# EAGLE board Pi-Puck Expansion v1.0 (EAGLE 9.5.2)
CREVISION: v1.0
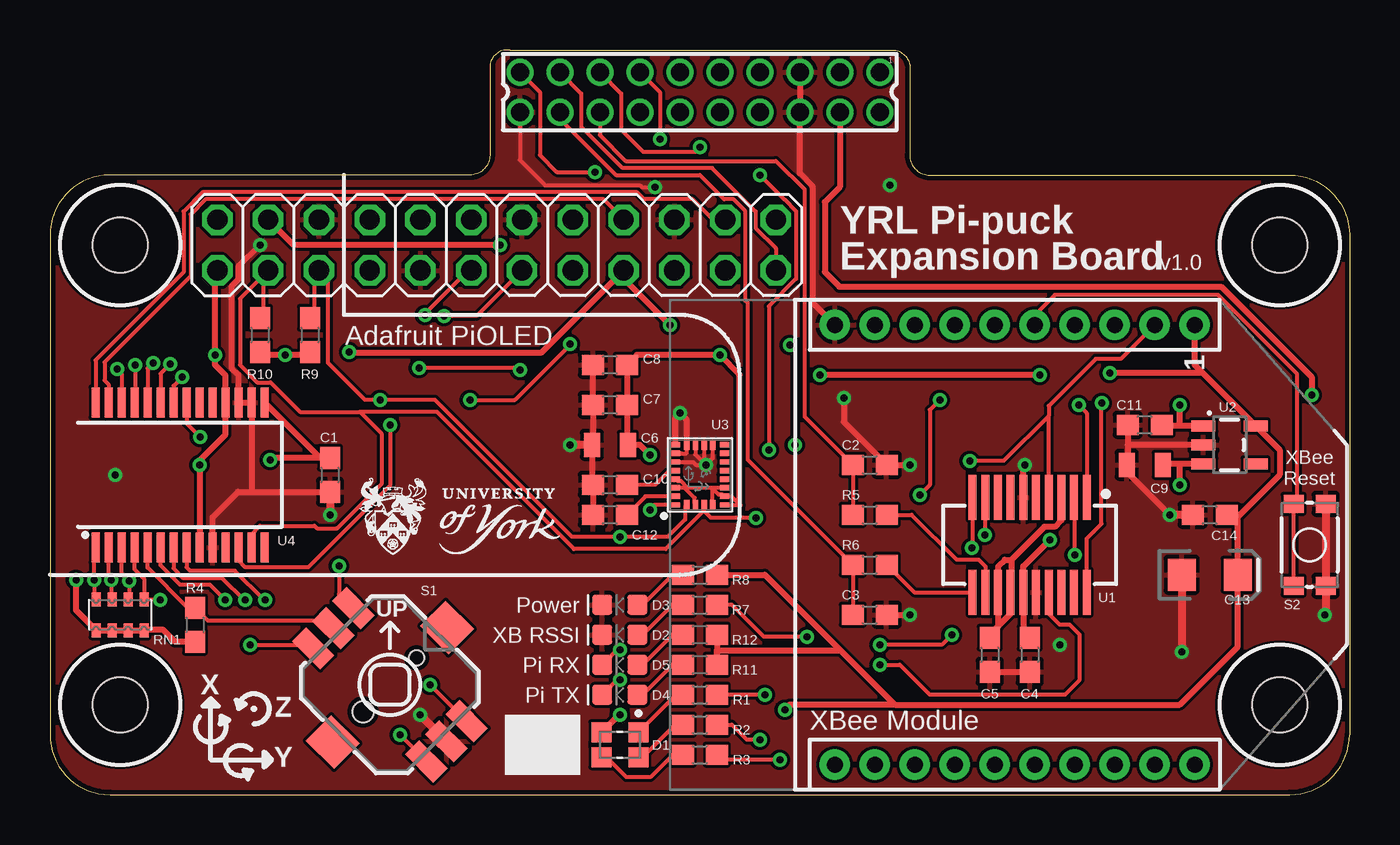
[diagram p0: board, top side]
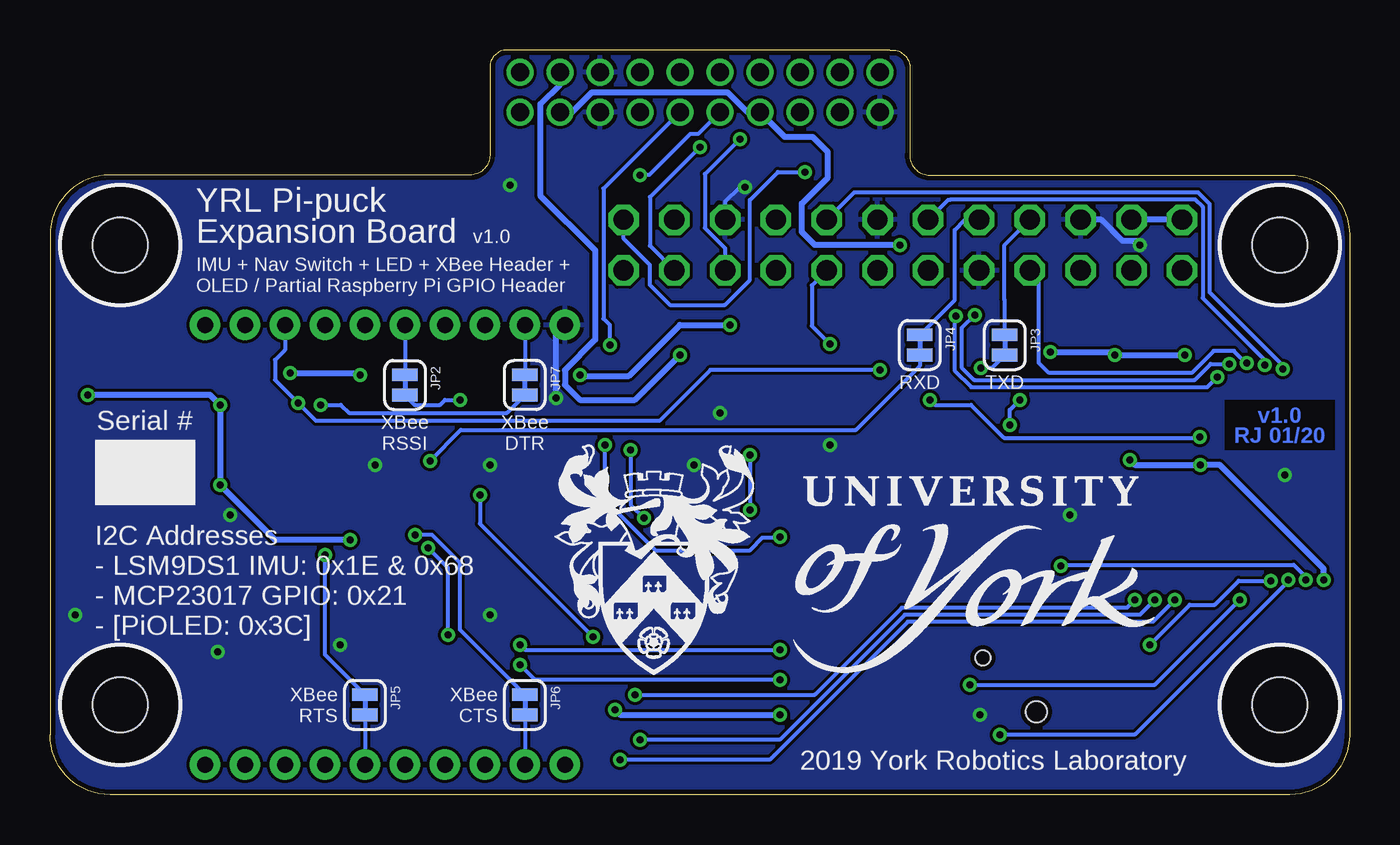
[diagram p1: board, bottom side, seen from below]

Size 65 x 37.26 mm. Coordinates in mm from the lower left corner, seen from the top.
Outline: 21,31 3,31 arc90 0,28 0,3 arc90 3,0 62,0 arc90 65,3 65,28 arc90 62,31 44,31 arc-90 43,32 43,36.5 arc90 42,37.25 23,37.25 arc90 22,36.5 22,32 arc-90 21,31
Copper layers (1*16): Top 0.018mm / dielectric 1.55mm / Bottom 0.018mm
Design rules "eC_2Layer_PClass6_BaseCopperO18_eCDefault *": minimum track width 0.15mm, minimum drill 0.35mm, track to track 0.15mm, track to pad 0.15mm, pad to pad 0.15mm, via to via 0.15mm, smd to smd 0mil, copper to edge 0.25mm, drill to drill 0.35mm, minimum pad ring 0.175mm, minimum via ring 0.125mm, stop-mask expansion 0mil, vias tented up to drill 0.45mm, thermal gap 0.2mm
Net classes: 0 default: width 0.203 mm
Holes 2.75 mm at 3.5,27.5 61.5,27.5 61.5,4.5 3.5,4.5
tRestrict: area 58.5,24.5 to 64.5,30.5; area 0.5,24.5 to 6.5,30.5; area 0.5,1.5 to 6.5,7.5; area 58.5,1.5 to 64.5,7.5
bRestrict: area 58.5,24.5 to 64.5,30.5; area 0.5,24.5 to 6.5,30.5; area 0.5,1.5 to 6.5,7.5; area 58.5,1.5 to 64.5,7.5; area 0.8,17.2 to 6.2,19.8

## Footprints (pad centres in the part's own frame; a part is rotated, then mirrored left to right if it is on the bottom)
0603 = smd 1.1 x 1: 1 -0.85,0; 2 0.85,0
0805 = smd 0.8 x 1.2: 1 -0.9,0; 2 0.9,0
EIA3216 = smd 1.4 x 1.6: + 1.4,0; - -1.4,0
LED_150080M153000 = smd 1 x 1: 1 -0.625,0.925; 2 0.625,0.925; 3 0.625,-0.925; 4 -0.625,-0.925
LED-0603 = smd 1 x 1: A -0.877,0; C 0.877,0
2X12 = drill 1.016 octagon: 1 -13.97,-1.27; 2 -13.97,1.27; 3 -11.43,-1.27; 4 -11.43,1.27; 5 -8.89,-1.27; 6 -8.89,1.27; 7 -6.35,-1.27; 8 -6.35,1.27; 9 -3.81,-1.27; 10 -3.81,1.27; 11 -1.27,-1.27; 12 -1.27,1.27; 13 1.27,-1.27; 14 1.27,1.27; 15 3.81,-1.27; 16 3.81,1.27; 17 6.35,-1.27; 18 6.35,1.27; 19 8.89,-1.27; 20 8.89,1.27; 21 11.43,-1.27; 22 11.43,1.27; 23 13.97,-1.27; 24 13.97,1.27
SMT-JUMPER_2_NC_TRACE_SILK = smd 0.635 x 1.27: 1 -0.508,0; 2 0.508,0
XBEE-SILK = drill 0.8 pad 1.524: 1 -11,20; 2 -11,18; 3 -11,16; 4 -11,14; 5 -11,12; 6 -11,10; 7 -11,8; 8 -11,6; 9 -11,4; 10 -11,2; 11 11,2; 12 11,4; 13 11,6; 14 11,8; 15 11,10; 16 11,12; 17 11,14; 18 11,16; 19 11,18; 20 11,20
EXBV8V = smd 0.45 x 0.7: 1 -1.2,-0.775; 2 -0.4,-0.775; 3 0.4,-0.775; 4 1.2,-0.775; 5 1.2,0.775; 6 0.4,0.775; 7 -0.4,0.775; 8 -1.2,0.775
JOYSTICK_MINI = smd 2 x 1: A -4,1.425; B 4,1.425; C -4,-1.425; CTR -4,0; D 4,-1.425; GND 4,0 | smd 2 x 1.8: NC 0,4.05; NC@0 0,-4.05 | hole 0.75: 0,1.9 | hole 1.05: 0,-1.9
TACTILE_SWITCH_SMD_4.6X2.8MM = smd 0.9 x 1: 1 -2.05,-0.8; 2 2.05,-0.8; 3 2.05,0.8; 4 -2.05,0.8
SSOP20_L = smd 0.4 x 2.25: 1 -2.857,-2.375; 2 -2.223,-2.375; 3 -1.587,-2.375; 4 -0.953,-2.375; 5 -0.318,-2.375; 6 0.318,-2.375; 7 0.953,-2.375; 8 1.587,-2.375; 9 2.223,-2.375; 10 2.857,-2.375; 11 2.857,2.375; 12 2.223,2.375; 13 1.587,2.375; 14 0.953,2.375; 15 0.318,2.375; 16 -0.318,2.375; 17 -0.953,2.375; 18 -1.587,2.375; 19 -2.223,2.375; 20 -2.857,2.375
SOT23-5 = smd 0.55 x 1.2: 1 -0.95,-1.3; 2 0,-1.3; 3 0.95,-1.3; 4 0.95,1.3; 5 -0.95,1.3
LGA24-8X4 = smd 0.27 x 0.45: 1 -1.505,1.225; 6 -1.505,-1.225; 7 -1.075,-1.225; 8 -0.645,-1.225; 9 -0.215,-1.225; 10 0.215,-1.225; 11 0.645,-1.225; 12 1.075,-1.225; 13 1.505,-1.225; 18 1.505,1.225; 19 1.075,1.225; 20 0.645,1.225; 21 0.215,1.225; 22 -0.215,1.225; 23 -0.645,1.225; 24 -1.075,1.225 | smd 0.45 x 0.27: 2 -1.475,0.645; 3 -1.475,0.215; 4 -1.475,-0.215; 5 -1.475,-0.645; 14 1.475,-0.645; 15 1.475,-0.215; 16 1.475,0.215; 17 1.475,0.645
SSOP28 = smd 0.4 x 1.5: 1 -4.225,-3.625; 2 -3.575,-3.625; 3 -2.925,-3.625; 4 -2.275,-3.625; 5 -1.625,-3.625; 6 -0.975,-3.625; 7 -0.325,-3.625; 8 0.325,-3.625; 9 0.975,-3.625; 10 1.625,-3.625; 11 2.275,-3.625; 12 2.925,-3.625; 13 3.575,-3.625; 14 4.225,-3.625; 15 4.225,3.625; 16 3.575,3.625; 17 2.925,3.625; 18 2.275,3.625; 19 1.625,3.625; 20 0.975,3.625; 21 0.325,3.625; 22 -0.325,3.625; 23 -0.975,3.625; 24 -1.625,3.625; 25 -2.275,3.625; 26 -2.925,3.625; 27 -3.575,3.625; 28 -4.225,3.625
87758-2016 = drill 0.9 pad 1.27: 1 -9,-1; 2 -9,1; 3 -7,-1; 4 -7,1; 5 -5,-1; 6 -5,1; 7 -3,-1; 8 -3,1; 9 -1,-1; 10 -1,1; 11 1,-1; 12 1,1; 13 3,-1; 14 3,1; 15 5,-1; 16 5,1; 17 7,-1; 18 7,1; 19 9,-1; 20 9,1

## Placement (x,y rotation side)
C1  0.1uF  [0603]  14,16 270 top
C2  47pF  [0603]  41,16.5 0 top
C3  47pF  [0603]  41,9 0 top
C4  0.1uF  [0603]  49,7 270 top
C5  0.1uF  [0603]  47,7 270 top
C6  10uF  [0805]  28,17.5 180 top
C7  0.1uF  [0603]  28,19.5 180 top
C8  0.1uF  [0603]  28,21.5 180 top
C9  10uF  [0805]  54.75,16.5 180 top
C10  10nF  [0603]  28,15.5 180 top
C11  0.1uF  [0603]  54.75,18.5 180 top
C12  0.1uF  [0603]  28,14 180 top
C13  10uF  [EIA3216]  58,11 0 top
C14  0.1uF  [0603]  58,14 180 top
D1  150080M153000  [LED_150080M153000]  28.5,2.5 270 top
D2  BLUE  [LED-0603]  28.5,8 180 top
D3  RED  [LED-0603]  28.5,9.5 180 top
D4  GREEN  [LED-0603]  28.5,5 180 top
D5  RED  [LED-0603]  28.5,6.5 180 top
JP1  Pi Header  [2X12]  22.34,27.5 0 top
JP2  RSSI_LED_EN  [SMT-JUMPER_2_NC_TRACE_SILK]  47.25,20.5 270 bottom
JP3  TXD  [SMT-JUMPER_2_NC_TRACE_SILK]  17.25,22.5 270 bottom
JP4  RXD  [SMT-JUMPER_2_NC_TRACE_SILK]  21.5,22.5 270 bottom
JP5  CTS_EN  [SMT-JUMPER_2_NC_TRACE_SILK]  49.25,4.5 270 bottom
JP6  RTS_EN  [SMT-JUMPER_2_NC_TRACE_SILK]  41.25,4.5 270 bottom
JP7  DTR  [SMT-JUMPER_2_NC_TRACE_SILK]  41.25,20.5 90 bottom
JP8  XBEE  [XBEE-SILK]  37.25,12.5 270 top
LOGO1  UOY-LOGO-30MM  [UOY-LOGO-30MM-WIDE]  39.75,6 0 bottom
LOGO2  UOY-LOGO-10MM  [UOY-LOGO-10MM-WIDE]  15.5,12 0 top
R1  1k  [0603]  32.5,5 0 top
R2  1k  [0603]  32.5,3.5 0 top
R3  1k  [0603]  32.5,2 0 top
R4  10k  [0603]  7.25,8.5 270 top
R5  27  [0603]  41,14 0 top
R6  27  [0603]  41,11.5 0 top
R7  1k  [0603]  32.5,9.5 0 top
R8  2.0k  [0603]  32.5,11 0 top
R9  4.7k  [0603]  13,23 270 top
R10  4.7k  [0603]  10.5,23 270 top
R11  1k  [0603]  32.5,6.5 180 top
R12  1k  [0603]  32.5,8 180 top
RN1  10k  [EXBV8V]  3.5,9 180 top
S1  Navigation  [JOYSTICK_MINI]  17,5.5 315 top
S2  Reset  [TACTILE_SWITCH_SMD_4.6X2.8MM]  63,12.5 90 top
U1  FT231XS  [SSOP20_L]  49,12.5 180 top
U2  MIC5219 3.3V  [SOT23-5]  59,17.5 270 top
U3  LSM9DS1  [LGA24-8X4]  32.5,16 90 top
U4  MCP23017SS  [SSOP28]  6.5,16 0 top
X1  87758-2016  [87758-2016]  32.5,35.15 180 top

## Library data of the parts
C1 C4 C5 C7 C8 C11 C12 C14 = SparkFun-Capacitors; PROD_ID: CAP-00810
C2 C3 = SparkFun-Capacitors; PROD_ID: CAP-08913
C6 C9 = SparkFun-Capacitors; PROD_ID: CAP-11330
C10 = SparkFun-Capacitors; PROD_ID: CAP-00867
C13 = SparkFun-Capacitors; PROD_ID: CAP-00811
D1 = 150080M153000; AVAILABILITY: Unavailable; DESCRIPTION: SMD Full Color LED Chip RGB 3.9 V 0805 | Würth Elektronik 150080M153000 @ LED, SMD _SMD Full Color LED Chip RGB 3.9 V...; MF: Wurth Electronics; MP: 150080M153000; PACKAGE: SMD-4 Würth Elektronik; PRICE: None
D2 = SparkFun-LED; PROD_ID: DIO-08575
D3 D5 = SparkFun-LED; PROD_ID: DIO-00819
D4 = SparkFun-LED; PROD_ID: DIO-00821
JP1 = pinhead
JP2-JP7 = SparkFun-Jumpers
JP8 = SparkFun-RF
LOGO1 LOGO2 = yrl-logos
R1-R3 R7 R11 R12 = SparkFun-Resistors; PROD_ID: RES-07856
R4 = SparkFun-Resistors; PROD_ID: RES-00824
R5 R6 = SparkFun-Resistors; PROD_ID: RES-09334
R8 = SparkFun-Resistors; PROD_ID: RES-08296
R9 R10 = SparkFun-Resistors; PROD_ID: RES-07857
RN1 = resistor-dil; OC_FARNELL: unknown; OC_NEWARK: unknown
S1 = SparkFun-Switches; PROD_ID: SWCH-09905; SF_SKU: COM-10063
S2 = SparkFun-Switches; PROD_ID: SWCH-13065
U1 = SparkFun-IC-Comms; PROD_ID: IC-11524
U2 = SparkFun-IC-Power; PROD_ID: VREG-09872
U3 = LSM9DS1; PROD_ID: IC-12536
U4 = microchip; MF: MICROCHIP; MPN: MCP23017-E/SS; OC_FARNELL: 1467674; OC_NEWARK: 31K2960
X1 = con-molex; MF: MOLEX; MPN: 87758-2016; OC_FARNELL: 7472374; OC_NEWARK: 25M5677

## Nets
3.3V: C1.1 C13.+ C14.1 D1.4 JP1.1 JP1.17 JP8.1 R4.2 R8.2 R9.2 R10.2 R11.1 R12.1 RN1.5 RN1.6 RN1.7 RN1.8 U2.5 U4.9 U4.15 U4.18
3V-INT: C5.1 U1.3 U1.13 U1.14
+3V: C6.1 C7.1 C8.1 U3.1 U3.3 U3.5 U3.6 U3.7 U3.8 U3.22 U3.23 X1.3
+5V: C4.1 C9.1 C11.1 JP1.2 JP1.4 U1.15 U2.1 U2.3 X1.4 X1.14
AIN_EXT2: X1.9
AIN_EXT3: X1.11
BATT_AUX+: X1.2
BATT_EPUCK+: X1.1
C1: C12.1 U3.24
CAP: C10.1 U3.21
CHARGE_DETECT: X1.7
CTS: JP6.1 U1.9
CTS_XBEE: JP6.2 JP8.12
DTR: JP7.1 U1.1
DTR_XBEE: JP7.2 JP8.9
GND: C1.2 C2.2 C3.2 C4.2 C5.2 C6.2 C7.2 C8.2 C9.2 C10.2 C11.2 C12.2 C13.- C14.2 D2.C D3.C JP1.6 JP1.9 JP1.14 JP1.20 JP8.10 S1.GND S2.1 S2.2 U1.6 U1.16 U2.2 U3.14 U3.15 U3.16 U3.17 U3.18 U3.19 U3.20 U4.10 U4.16 U4.17 X1.5 X1.6 X1.20
GPA0: JP1.15 U4.21
GPA1: JP1.13 U4.22
GPA2: JP1.11 U4.23
GPA3: JP1.7 U4.24
GPA4: JP1.12 U4.25
GPA5: JP1.16 U4.26
GPA6: JP1.18 U4.27
GPA7: JP1.22 U4.28
LED_USER_B: R3.2 U4.6
LED_USER_G: R2.2 U4.7
LED_USER_R: R1.2 U4.8
N$1: D5.A R12.2
N$2: JP1.8 JP3.1
N$3: JP1.10 JP4.1
N$4: D4.A R11.2
N$6: D1.1 R1.1
N$7: R6.2 U1.11
N$8: R5.2 U1.12
N$9: JP2.2 R7.2
N$10: D1.2 R2.1
N$11: D1.3 R3.1
N$38: D3.A R8.1
NAV_CENT: R4.1 S1.CTR U4.5
NAV_DOWN: RN1.3 S1.D U4.2
NAV_LEFT: RN1.2 S1.C U4.3
NAV_RIGHT: RN1.1 S1.B U4.4
NAV_UP: RN1.4 S1.A U4.1
PIC_RESET/RESET_F407: X1.8
RESET_XBEE: JP8.5 S2.3 S2.4
RPI_SPI0_CE0: JP1.24 X1.19
RPI_SPI0_MISO: JP1.21 X1.15
RPI_SPI0_MOSI: JP1.19 X1.13
RPI_SPI0_SCLK: JP1.23 X1.17
RSSI_XBEE: JP2.1 JP8.6
RSSILED: D2.A R7.1
RTS: JP5.1 U1.2
RTS_XBEE: JP5.2 JP8.16
RXD: JP4.2 JP8.2 U1.4
RXLED: D5.C U1.10
SCL_BOARD: JP1.5 R9.1 U3.2 U4.12 X1.10
SDA_BOARD: JP1.3 R10.1 U3.4 U4.13 X1.12
TXD: JP3.2 JP8.3 U1.20
TXLED: D4.C U1.17
USB_AUX2_DM: C2.1 R5.1 X1.16
USB_AUX2_DP: C3.1 R6.1 X1.18

## Tracks (layer width: path | path; a pad name or v marks a point on that pad's centre or on a via)
3.3V  (via drill 0.35 pad 0.7)
  Top 0.305: U2.5 | U2.5 57.25,21.5 JP8.1 | U2.5 61.5,17.25 61.5,16 59.5,14 | 42.25,4.5 56.5,4.5 59.4,7.4 C13.+ 59.4,13.9 59.5,14 | R8.2 35.75,11 39.52,7.22 | 42.25,4.5 39.52,7.22 | R4.2 6.25,7.65 5.65,8.25 4.72,8.25 RN1.8 RN1.7 RN1.6 RN1.5 1.3,9.22 v1.3,10.75 | U4.15 13.5,16.85 C1.1 11.1,16.85 v11,16.75 | JP1.1 8.25,26.11 v8.25,22 8.25,21.5 8.78,20.98 U4.18 8.78,18.02 7.47,16.73 v7.47,16.5 U4.9 | R9.2 12.85,22 v11.75,22 10.65,22 R10.2 | v14.95,22.15 15,22.1 24.56,22.1 JP1.17 28.69,25.81 v31,23.5 | U2.5 57.65,21.1 v53,21.1 | v49.5,21 v38.5,21 | 59.5,14 C14.1 | D1.4 28.45,4 v28.5,4 | v36.75,4.25 37,4.5 42.25,4.5 | R12.1 R11.1 33.35,7.22 39.52,7.22
  Bottom 0.305: v11,16.75 10.75,16.5 v7.47,16.5 6.5,16.5 1.3,11.3 v1.3,10.75 | v8.25,22 v11.75,22 11.9,22.15 v14.95,22.15 | v53,21.1 49.6,21.1 v49.5,21 | v38.5,21 38.45,20.95 36.05,20.95 33.5,23.5 v31,23.5 | v36.75,4.25 36.5,4 v28.5,4
3V-INT
  Top 0.305: C5.1 47,8 47.41,8.41 | 48.08,11.75 47.75,11.75 47.41,11.41 U1.13 47.41,8.41 | 48.08,11.75 49.73,13.4 50.25,13.4 50.59,13.74 U1.3 | 48.08,11.75 48.08,10.15 U1.14 48.05,9.05 47.41,8.41
+3V  (via drill 0.35 pad 0.7)
  Top 0.203: U3.3 32.24,14.57 32.24,14.85 31.74,15.36 U3.23 31.89,15.36 | U3.8 33.1,15.36 | 33.1,15.36 31.89,15.36 | 33.15,15.31 33.45,15.01 33.64,15.01 U3.7 34.08,14.93 34.5,14.5 34.49,14.49 U3.6 | U3.5 33.15,15.31 | 33.15,15.31 33.1,15.36 | U3.22 31.36,15.7 31.55,15.7 31.89,15.36 | U3.1 30.25,14.5 v30,14.25
  Top 0.305: 34.49,14.49 34.49,21 v33.5,22 29.35,22 C8.1 C7.1 28.85,17.55 C6.1 29.5,17.5 v30,17
  Bottom 0.203: v30,17 v30,14.25
  Bottom 0.305: X1.3 39.5,35.53 40.48,34.55 40.48,29.98 37.74,27.24 37.74,22.76 39.25,21.25 39.25,20.5 38.5,19.75 35.75,19.75 v33.5,22
+5V  (via drill 0.35 pad 0.7)
  Top 0.305: X1.4 39.5,30.4 38.75,29.65 38.75,26.15 39.48,25.42 58.59,25.42 63.1,20.91 v63.1,20 | v50,12.75 48.68,11.43 U1.15 48.68,8.17 C4.1 | v22.5,27.5 12.18,27.5 JP1.4 | U2.1 56.5,18.45 | 56.5,18.45 55.65,18.45 C11.1 | U2.3 56.5,16.55 | 56.5,16.55 55.7,16.55 C9.1 | v56.5,15.5 56.5,16.55 | 56.5,18.45 v56.5,19.5
  Bottom 0.305: JP1.2 JP1.4 | X1.4 38.88,34.15 37.91,35.13 31.09,35.13 30.12,34.15 X1.14 28.25,32.9 26.85,32.9 26.1,32.15 26.1,31.42 26.1,30.88 27.4,29.58 27.4,28.15 26.75,27.5 v22.5,27.5 | v50,12.75 53.75,12.75 v56.5,15.5 v56.5,19.5 57,20 v63.1,20
C1
  Top 0.203: U3.24 29.77,14.93 C12.1
CAP
  Top 0.203: U3.21 31.23,16.17 30.95,16.17 30.27,15.5 C10.1
CTS  (via drill 0.35 pad 0.7)
  Top 0.203: v46.75,13 46.78,13.03 U1.9
  Bottom 0.203: JP6.1 44.5,8.26 44.5,11.6 45.9,13 v46.75,13
CTS_XBEE
  Bottom 0.203: JP6.2 JP8.12
DTR  (via drill 0.35 pad 0.7)
  Top 0.203: v51.45,19.5 51.86,19.09 U1.1
  Bottom 0.203: JP7.1 42.14,19.1 50.05,19.1 50.45,19.5 v51.45,19.5
DTR_XBEE
  Bottom 0.203: JP8.9 JP7.2
GND  (via drill 0.35 pad 0.7)
  Top 0.203: v63.75,9 63.8,9.05 S2.1 S2.2 | U3.19 31.59,17.07 31.83,17.07 31.83,17.45 U3.17 | v32.8,16.5 32.3,16.5 32.16,16.64 U3.20 | U3.16 32.28,17.02 v32.8,16.5 | U3.15 32.72,16.59 v32.8,16.5 | U3.14 33.15,16.84 v32.8,16.5 | X1.20 23.5,31.75 24.76,30.49 29.51,30.49 29.6,30.4 v30.25,30.4
  Top 0.305: C3.2 v43,9 | U1.6 48.68,16.43 v48.75,16.5 | v43,16.5 C2.2 39.7,18.65 v39.7,19.85 | U4.10 8.12,13.88 9.4,15.15 10,15.15 | 10,15.15 C1.2 | 10,15.15 10.07,15.22 U4.16 U4.17 9.43,21 9.1,21.33 9.1,25.45 9.43,25.79 9.43,26.43 v10.5,27.5 | JP8.10 38.15,24.6 38.15,30.43 37.5,31.08 X1.6 X1.5 | C8.2 C7.2 27.15,17.55 C6.2 27.1,15.55 C10.2 C12.2 | U3.18 31.27,18.88 v31.5,19.1 31.86,18.75 U3.17 | C5.2 C4.2 | C11.2 53.9,17.5 | 53.9,17.5 53.9,16.55 C9.2 53.85,16.15 v56,14 | U2.2 53.9,17.5
  Top 0.406: C13.- v56.6,7.15 | C14.2 v56,14 | S2.2 63.8,9.05 | C6.2 v26,17.5 | C1.2 v14,14 | S1.GND v18.5,4 | v18.5,4
  Bottom 0.203: JP1.20 31.23,29.67 30.5,30.4 v30.25,30.4
  Bottom 0.305: v10.5,27.5 10.71,27.71 11.35,27.71 12.41,28.77 JP1.6 | v39.7,19.85 39.7,23.05 JP8.10
  other vias: 50.5,7.5 3.25,16 42,30.5
  pour Bottom: -1,38 -1,-1 66,-1 66,38
  pour Top (isolate 0.151): -2,39 -2,-2 67,-2 67,39
GPA0  (via drill 0.35 pad 0.7)
  Top 0.203: U4.21 6.83,18.57 v7.5,17.9 | v21,19.75 23.25,19.75 26,22.5 v26,22.55
  Bottom 0.203: v7.5,17.9 7.55,17.9 7.6,17.85 17.28,17.85 18.93,19.5 20.75,19.5 v21,19.75 | v26,22.55 26.9,23.45 26.9,25.48 JP1.15
GPA1  (via drill 0.35 pad 0.7)
  Top 0.203: JP1.13 21.33,23.95 v19.7,23.95 | v6.62,20.9 6.17,20.45 U4.22
  Bottom 0.203: v19.7,23.95 19.75,23.89 19.75,21.23 18.93,20.39 7.12,20.39 v6.62,20.9
GPA2  (via drill 0.35 pad 0.7)
  Top 0.203: v18.75,24 18.75,24.06 20.92,26.23 JP1.11 | v6.01,21.55 5.53,21.06 U4.23
  Bottom 0.203: v18.75,24 19.4,23.35 19.4,21.37 18.78,20.75 7.75,20.75 6.95,21.55 v6.01,21.55
GPA3  (via drill 0.35 pad 0.7)
  Top 0.203: v5.15,21.6 4.88,21.32 U4.24
  Bottom 0.203: JP1.7 15.55,25.79 15.55,21.62 15.03,21.1 7.89,21.1 6.79,22.2 5.78,22.2 5.18,21.6 v5.15,21.6
GPA4  (via drill 0.35 pad 0.7)
  Top 0.203: v4.25,21.5 4.25,19.65 U4.25
  Bottom 0.203: JP1.12 20.07,29.77 19.96,29.77 19.95,29.78 7.72,29.78 7.35,29.41 7.35,24.85 4.25,21.75 v4.25,21.5
GPA5  (via drill 0.35 pad 0.7)
  Top 0.203: v3.35,21.3 3.58,21.07 U4.26
  Bottom 0.203: v3.35,21.3 3.35,21.48 7,25.13 7,29.55 7.58,30.14 24.76,30.14 26.13,28.77 JP1.16
GPA6
  Top 0.203: U4.27 2.92,20.52 2.73,20.73 2.73,21.63 7.03,25.94 7.03,29.03 7.78,29.78 27.68,29.78 JP1.18
GPA7
  Top 0.203: U4.28 2.27,21.73 6.68,26.14 6.68,29.18 7.64,30.14 29.36,30.14 29.72,29.78 32.15,29.78 33.16,28.77 JP1.22
LED_USER_B  (via drill 0.35 pad 0.7)
  Top 0.203: v36.5,1.75 33.6,1.75 R3.2 | U4.6 5.53,11.47 6.5,10.5 8,10.5 v8.75,9.75
  Bottom 0.203: v8.75,9.75 9.85,8.65 22.1,8.65 29,1.75 v36.5,1.75
LED_USER_G  (via drill 0.35 pad 0.7)
  Top 0.203: R2.2 34.1,3.5 34.85,2.75 v35.5,2.75 | U4.7 6.17,11.32 6.65,10.85 8.6,10.85 9.7,9.75 v9.75,9.75
  Bottom 0.203: v9.75,9.75 10.5,9 22.25,9 28.5,2.75 v35.5,2.75
LED_USER_R  (via drill 0.35 pad 0.7)
  Top 0.203: v35.75,5 R1.2 | U4.8 6.83,11.38 7,11.21 9.25,11.21 10.7,9.75 v10.75,9.75
  Bottom 0.203: v10.75,9.75 11.14,9.36 22.39,9.36 26.75,5 v35.75,5
N$1
  Top 0.203: R12.2 31.13,8 29.63,6.5 D5.A
N$2
  Bottom 0.203: JP3.1 17.25,24.75 17.25,27.51 JP1.8
N$3
  Bottom 0.203: JP1.10 19.23,28.77 19.75,28.25 19.75,24.76 JP4.1
N$4
  Top 0.203: R11.2 31.13,6.5 29.63,5 D4.A
N$6
  Top 0.203: D1.1 31.3,5 R1.1
N$7
  Top 0.203: R6.2 43.23,10.12 U1.11
N$8
  Top 0.203: R5.2 43.1,14 45.35,11.75 46.45,11.75 46.8,11.4 46.8,9.84 U1.12
N$9  (via drill 0.35 pad 0.7)
  Top 0.203: v44.5,19.75 44,19.25 44,15.5 v43.5,15 | v37.85,7.9 35.7,7.9 34.1,9.5 R7.2
  Bottom 0.203: v43.5,15 43.5,13.55 v37.85,7.9 | v44.5,19.75 45.25,19.75 45.5,19.5 46.76,19.5 JP2.2
N$10
  Top 0.203: D1.2 29.62,1.88 31.25,3.5 R2.1
N$11
  Top 0.203: R3.1 31.16,2 30.03,0.87 28.83,0.87 27.82,1.88 D1.3
N$38
  Top 0.203: D3.A 29.63,9.5 31.13,11 R8.1
NAV_CENT
  Top 0.203: S1.CTR 13.8,8.7 7.9,8.7 R4.1 6.89,9.35 4.88,11.37 U4.5
NAV_DOWN  (via drill 0.35 pad 0.7)
  Top 0.203: RN1.3 3.07,9.8 v3.07,10.75 2.92,10.9 U4.2 | S1.D 18.34,2.16 v17.5,3
  Bottom 0.203: v17.5,3 17.47,3.03 10.72,3.03 3.07,10.68 v3.07,10.75
NAV_LEFT  (via drill 0.35 pad 0.7)
  Top 0.203: RN1.2 3.95,9.82 v3.95,10.7 3.67,10.98 3.67,11 3.58,11.1 U4.3 | v10,7.5 12.98,7.5 S1.C
  Bottom 0.203: v10,7.5 8,9.5 6.75,9.5 5.55,10.7 v3.95,10.7
NAV_RIGHT  (via drill 0.35 pad 0.7)
  Top 0.203: S1.B 20.25,4.25 v19,5.5 | U4.4 4.22,11.28 4.7,10.8 RN1.1 4.72,9.75 v5.5,9.75
  Bottom 0.203: v19,5.5 9.75,5.5 v5.5,9.75
NAV_UP  (via drill 0.35 pad 0.7)
  Top 0.203: RN1.4 2.2,9.88 v2.2,10.75 2.2,12.3 U4.1 | S1.A 14.45,10.03 v14.45,11.45
  Bottom 0.203: v14.45,11.45 14.4,11.5 2.8,11.5 2.2,10.9 v2.2,10.75
RESET_XBEE
  Top 0.203: S2.4 S2.3 62.35,14.7 62.35,21.08 58.43,25 50.25,25 49.25,24 JP8.5
RPI_SPI0_CE0  (via drill 0.35 pad 0.7)
  Top 0.203: X1.19 24.5,35.15 24.5,32 25.35,31.15 v27.25,31.15
  Bottom 0.203: JP1.24 36.31,27.81 35,26.5 35,25.5 34,24.5 31.25,24.5 30,25.75 30,29.75 28.6,31.15 v27.25,31.15
RPI_SPI0_MISO  (via drill 0.35 pad 0.7)
  Top 0.203: X1.15 28.57,35.08 28.57,33.27 29.69,32.15 32.25,32.15 v32.5,32.4
  Bottom 0.203: v32.5,32.4 35,29.9 35,27.46 JP1.21
RPI_SPI0_MOSI  (via drill 0.35 pad 0.7)
  Top 0.203: X1.13 30.5,35.15 v30.5,32.8
  Bottom 0.203: JP1.19 31.23,27.34 32.24,28.35 32.24,31.06 v30.5,32.8
RPI_SPI0_SCLK
  Top 0.203: X1.17 26.57,35.08 26.57,33.43 28.65,31.35 33.12,31.35 35.3,29.18 35.3,28.35 36.31,27.34 JP1.23
RSSI_XBEE
  Bottom 0.203: JP8.6 JP2.1
RSSILED
  Top 0.203: R7.1 31.13,9.5 29.63,8 D2.A
RTS  (via drill 0.35 pad 0.7)
  Top 0.203: v51.25,12 51.25,15.15 U1.2
  Bottom 0.203: JP5.1 51.25,7.01 v51.25,12
RTS_XBEE
  Bottom 0.203: JP5.2 JP8.16
RXD  (via drill 0.35 pad 0.7)
  Top 0.203: U1.4 49.95,18.95 | 49.95,18.95 47.7,16.7 v46,16.7 | JP8.2 53.55,21.8 52.3,21.8 49.95,19.45 49.95,18.95
  Bottom 0.203: v46,16.7 44.45,18.25 24.7,18.25 21.5,21.45 JP4.2
RXLED  (via drill 0.35 pad 0.7)
  Top 0.203: v45.1,8 44.6,7.5 v41.5,7.5 | v28.5,7.25 28.37,7.25 D5.C | U1.10 46.14,12.39 v46.1,12.35
  Bottom 0.203: v45.1,8 45.1,11.35 v46.1,12.35 | v41.5,7.5 41.25,7.25 v28.5,7.25
SCL_BOARD  (via drill 0.35 pad 0.7)
  Top 0.203: U3.2 31.77,14.44 31.77,13.77 30.9,12.9 v28.5,12.9 26.1,12.9 19.25,19.75 v16.5,19.75 15.75,19.75 13.9,21.6 13.9,25.78 JP1.5 13.2,25.98 13.2,24.05 R9.1 | v37,22.5 37.25,22.25 v37.25,17.5 | v17,18.5 17,15.47 12.9,11.37 9.77,11.37 9.43,11.72 U4.12
  Bottom 0.203: v37,22.5 37,23.49 37.32,23.81 37.32,30.33 X1.10 | v37.25,17.5 37.25,14.75 34.7,12.2 30.02,12.2 29.36,12.86 28.54,12.86 v28.5,12.9 | v17,18.5 17,19.25 v16.5,19.75
SDA_BOARD  (via drill 0.35 pad 0.7)
  Top 0.203: R10.1 10.66,24.01 10.66,25.98 JP1.3 9.5,24.82 9.5,21.5 10.37,20.63 11.03,20.63 12.51,19.15 15.5,19.15 | 15.5,19.15 19.35,19.15 26.21,12.29 30.79,12.29 32.67,14.17 32.67,14.48 U3.4 32.72,14.19 33.05,13.85 v35.3,13.85 | v35.5,31 36.72,29.78 36.73,29.78 37.32,29.19 37.32,25.81 35.95,24.44 v35.95,17.25 | U4.13 10.07,13.03 10.49,13.45 13.24,13.45 13.36,13.32 14.35,13.32 16.6,15.57 16.6,18.04 15.5,19.15
  Bottom 0.203: v35.95,17.25 35.95,14.5 v35.3,13.85 | X1.12 32.6,33.05 32.98,33.05 35.03,31 v35.5,31
TXD  (via drill 0.35 pad 0.7)
  Top 0.203: U1.20 51.86,12.81 52.6,13.55 v52.6,19.6 | v52.6,19.6 | v23.5,21.25 23.4,21.35 v18.45,21.35
  Bottom 0.203: JP8.3 53.25,22.25 53.75,21.75 53.75,20.75 v52.6,19.6 51.7,18.7 34.52,18.7 31.97,21.25 v23.5,21.25 | v18.45,21.35 17.89,21.35 JP3.2
TXLED  (via drill 0.35 pad 0.7)
  Top 0.203: v41.5,6.5 42.5,6.5 44,5 50.75,5 51.5,5.75 51.5,8 51,8.5 50.5,8.5 49.95,9.05 U1.17 | v28.5,5.75 28.37,5.75 D4.C
  Bottom 0.203: v28.5,5.75 40.75,5.75 v41.5,6.5
USB_AUX2_DM
  Top 0.203: R5.1 C2.1 37.75,18.9 37.75,30.26 36.31,31.71 28.79,31.71 27.5,33 X1.16
USB_AUX2_DP
  Top 0.203: C3.1 R6.1 34.9,16.75 34.9,24.6 34.78,24.72 34.78,29.19 34.19,29.78 33.72,29.78 32.5,31 28.3,31 25.5,33.8 X1.18

## Text on the board
Bottom: RJ 01/20
tPlace: Power | XB RSSI | Pi RX | X | Pi TX | Z | Y
bPlace: TXD | RXD | XBee / DTR | XBee / RSSI | XBee / CTS | XBee / RTS
tNames: YRL Pi-puck / Expansion Board | Adafruit PiOLED | XBee / Reset | XBee Module
bNames: YRL Pi-puck / Expansion Board | IMU + Nav Switch + LED + XBee Header + / OLED / Partial Raspberry Pi GPIO Header | Serial # | I2C Addresses / - LSM9DS1 IMU: 0x1E & 0x68 / - MCP23017 GPIO: 0x21 / - [PiOLED: 0x3C] | 2019 York Robotics Laboratory